# Altium PCB PCB1.PcbDoc
Units mm, origin at the board's own origin, x right, y up, seen from the top; angles counter-clockwise.
Board outline 250 x 94 mm, 2 copper layers (Top Layer, Bottom Layer); 174 components, 196 nets, 724 pads, 5 vias.
Unrouted connection lines stored in the file: 444.
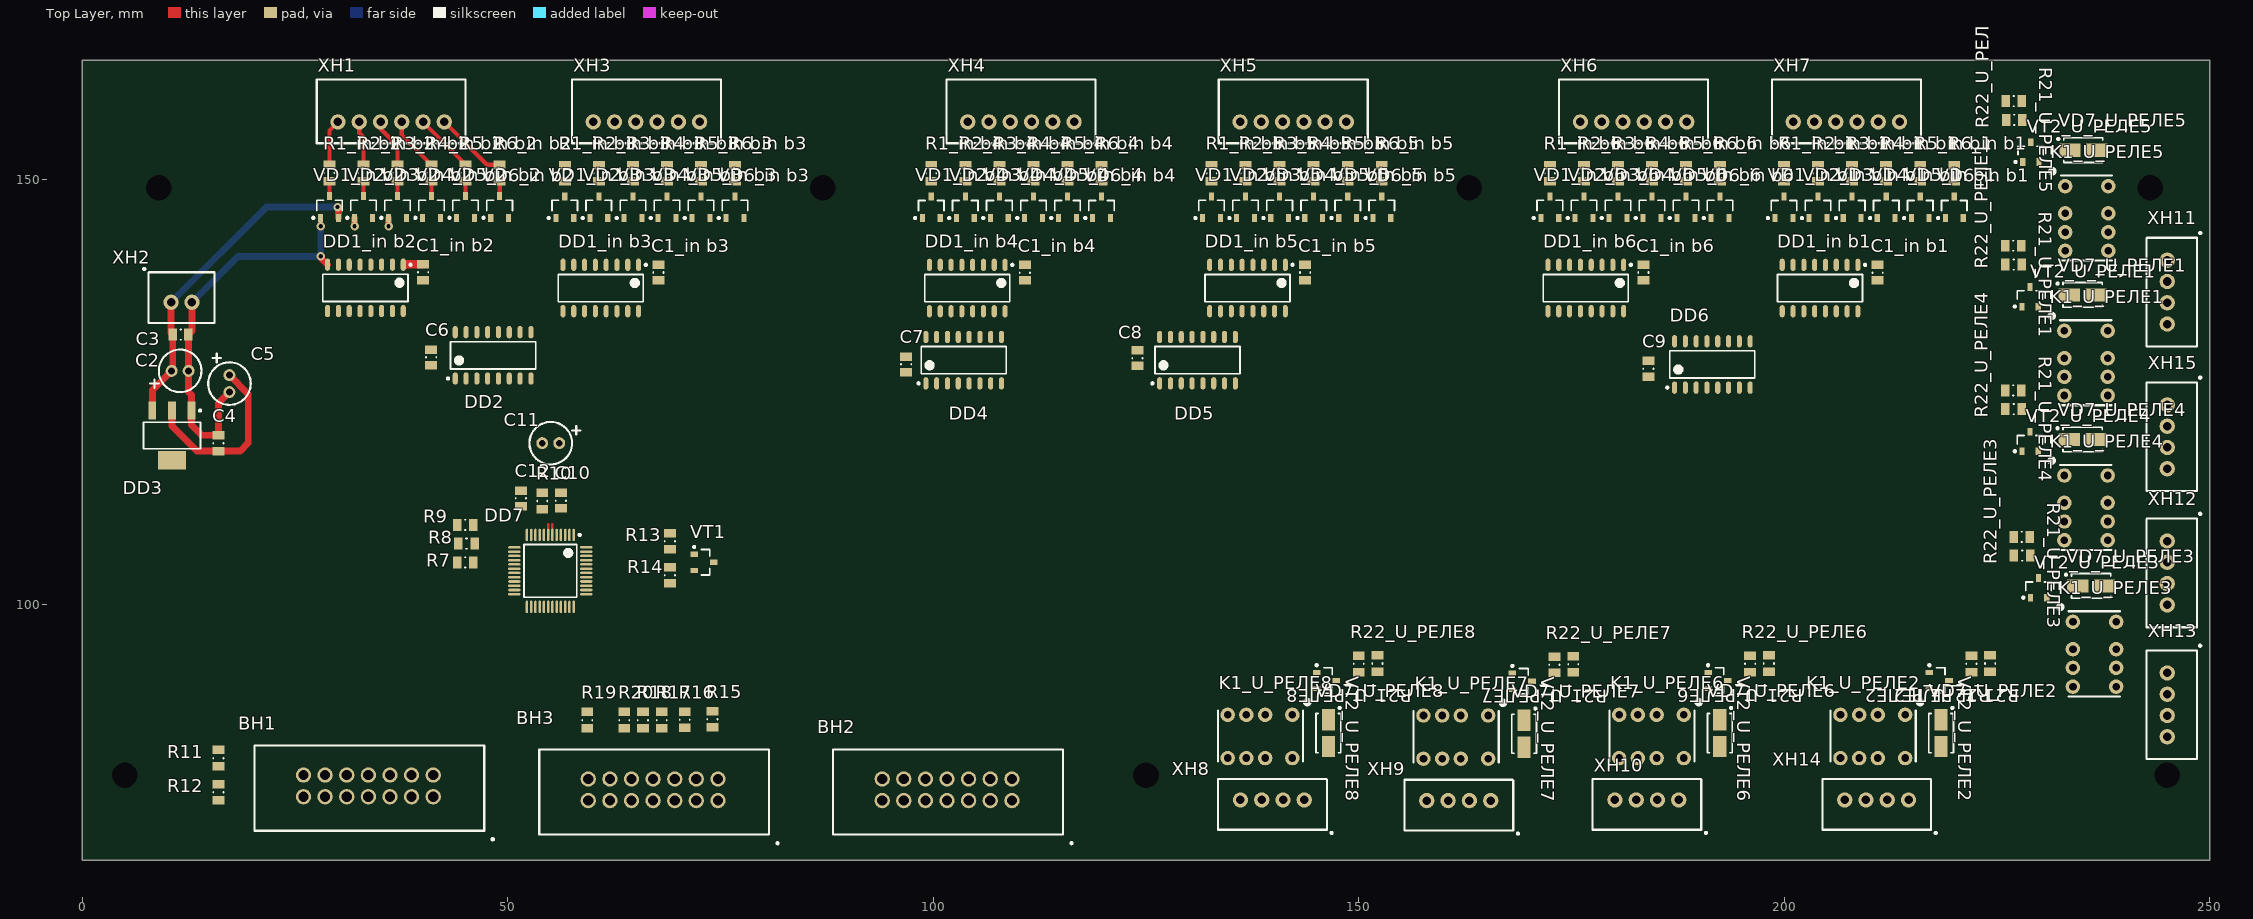
[diagram p0: Top Layer view]
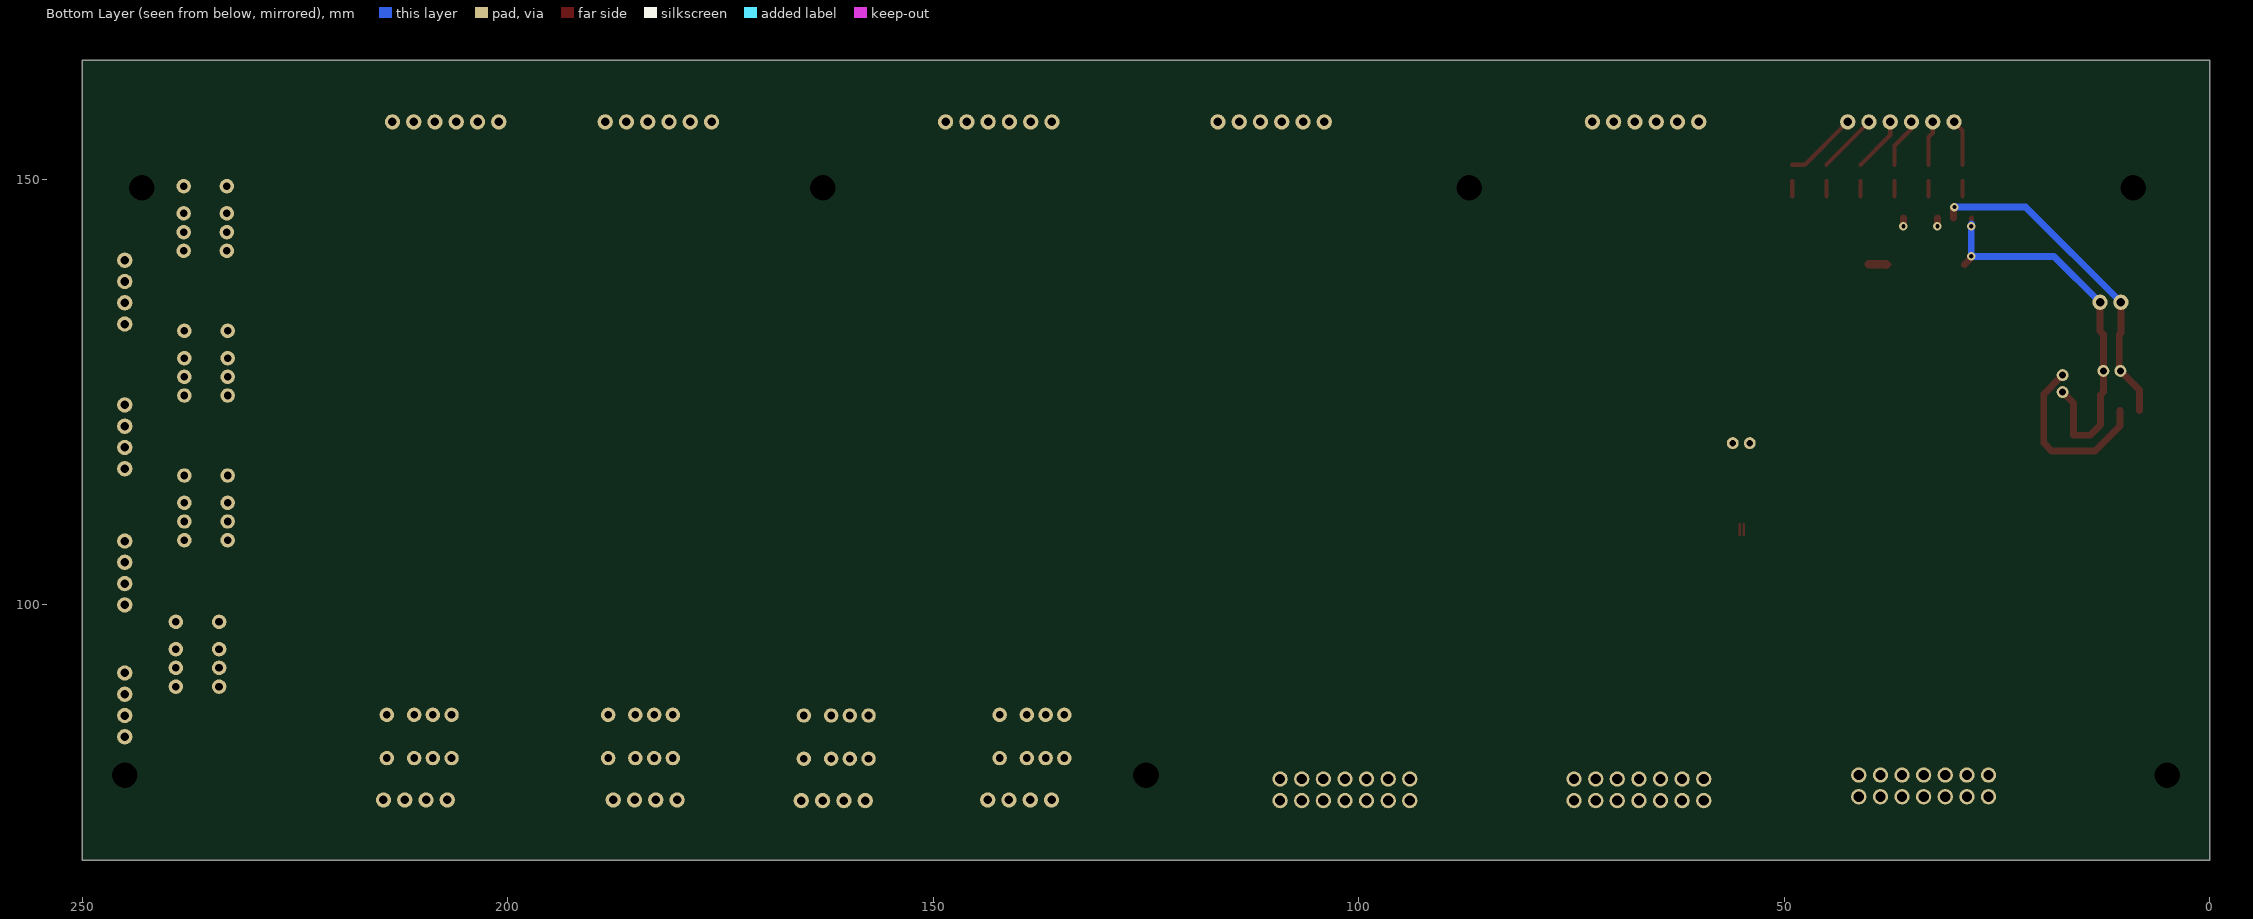
[diagram p1: Bottom Layer view, seen from below]

## Layer stack, top to bottom
Top Solder: solder mask 0.0102, Solder Resist, Dk 3.5
Top Layer: signal copper 0.0356
Dielectric 1: dielectric 0.32, FR-4, Dk 4.8
Bottom Layer: signal copper 0.0356
Bottom Solder: solder mask 0.0102, Solder Resist, Dk 3.5

## Board outline
0,70 0,164 250,164 250,70

## Design rules (kind name [scope] priority, off if disabled: settings)
Clearance [All] p1: gap=0.15 ignorepadtopadclearanceinfootprint=FALSE
PolygonConnect [All] p1: connectstyle=Relief reliefconductorwidth=0.254 reliefentries=4 polygonreliefangle="90 Angle" airgapwidth=0.254
RoomDefinition U_УПРАВЛ [InComponentClass('U_УПРАВЛ')] p1: confinementstyle=ConfineIn formatcopy=TRUE lockcomponents=FALSE outline 14.771,76.021 14.771,83.979 17.859,83.979 17.859,84.841 49.071,84.841 49.071,109.733 50.321,109.733 50.321,114.483 52.169,114.483 52.169,121.885 58.931,121.885 58.931,109.733 60.029,109.733 60.029,109.443 70.279,109.443 70.279,107.308 75.179,107.308 75.179,88.533 75.279,88.533 75.279,84.381 117.621,84.381 117.621,70.619 83.081,70.619 51.319,70.619 51.319,71.079 17.859,71.079 17.859,76.021
RoomDefinition СОЕД [InComponentClass('СОЕД')] p2: confinementstyle=ConfineIn formatcopy=TRUE lockcomponents=FALSE outline 133.094,72.701 133.094,79.911 242.169,79.911 242.169,144.204 249.379,144.204 249.379,95.704 249.379,81.494 249.379,72.701 218.304,72.701 169.204,72.701 169.204,72.621 154.994,72.621 154.994,72.701
RoomDefinition U_СОГЛАСОВАНИЕ [InComponentClass('U_СОГЛАСОВАНИЕ')] p3: confinementstyle=ConfineIn formatcopy=TRUE lockcomponents=FALSE outline 6.665,115.381 6.665,124.439 6.788,124.439 6.788,139.964 27.169,139.964 27.169,162.135 101.169,162.135 151.431,162.135 216.431,162.135 216.431,153.873 197.079,153.873 197.079,124.275 47.135,124.275 47.135,102.775 43.177,102.775 43.177,114.025 14.321,114.025 14.321,115.381
RoomDefinition U_РЕЛЕ8 [InComponentClass('U_РЕЛЕ8')] p4: confinementstyle=ConfineIn formatcopy=TRUE lockcomponents=FALSE outline 144.704,80.794 133.069,80.794 133.069,89.334 144.071,89.334 144.071,93.413 148.767,93.413 148.767,95.038 150.971,95.038 150.971,95.088 153.429,95.088 153.429,91.13 151.225,91.13 151.225,91.08 148.408,91.08 148.408,81.61 144.704,81.61
RoomDefinition U_РЕЛЕ7 [InComponentClass('U_РЕЛЕ7')] p5: confinementstyle=ConfineIn formatcopy=TRUE lockcomponents=FALSE outline 167.704,80.714 156.069,80.714 156.069,89.254 167.071,89.254 167.071,93.333 171.767,93.333 171.767,94.958 173.971,94.958 173.971,95.008 176.429,95.008 176.429,91.05 174.225,91.05 174.225,91 171.408,91 171.408,81.53 167.704,81.53
RoomDefinition U_РЕЛЕ5 [InComponentClass('U_РЕЛЕ5')] p6: confinementstyle=ConfineIn formatcopy=TRUE lockcomponents=FALSE outline 239.286,151.704 239.286,140.069 230.746,140.069 230.746,151.071 226.667,151.071 226.667,155.767 225.042,155.767 225.042,157.971 224.992,157.971 224.992,160.429 228.95,160.429 228.95,158.225 229,158.225 229,155.408 238.47,155.408 238.47,151.704
RoomDefinition U_РЕЛЕ4 [InComponentClass('U_РЕЛЕ4')] p7: confinementstyle=ConfineIn formatcopy=TRUE lockcomponents=FALSE outline 239.206,117.704 239.206,106.069 230.666,106.069 230.666,117.071 226.587,117.071 226.587,121.767 224.962,121.767 224.962,123.971 224.912,123.971 224.912,126.429 228.87,126.429 228.87,124.225 228.92,124.225 228.92,121.408 238.39,121.408 238.39,117.704
RoomDefinition U_РЕЛЕ3 [InComponentClass('U_РЕЛЕ3')] p8: confinementstyle=ConfineIn formatcopy=TRUE lockcomponents=FALSE outline 240.206,100.504 240.206,88.869 231.666,88.869 231.666,99.871 227.587,99.871 227.587,104.567 225.962,104.567 225.962,106.771 225.912,106.771 225.912,109.229 229.87,109.229 229.87,107.025 229.92,107.025 229.92,104.208 239.39,104.208 239.39,100.504
RoomDefinition U_РЕЛЕ2 [InComponentClass('U_РЕЛЕ2')] p9: confinementstyle=ConfineIn formatcopy=TRUE lockcomponents=FALSE outline 216.704,80.794 205.069,80.794 205.069,89.334 216.071,89.334 216.071,93.413 220.767,93.413 220.767,95.038 222.971,95.038 222.971,95.088 225.429,95.088 225.429,91.13 223.225,91.13 223.225,91.08 220.408,91.08 220.408,81.61 216.704,81.61
RoomDefinition U_РЕЛЕ1 [InComponentClass('U_РЕЛЕ1')] p10: confinementstyle=ConfineIn formatcopy=TRUE lockcomponents=FALSE outline 239.206,134.704 239.206,123.069 230.666,123.069 230.666,134.071 226.587,134.071 226.587,138.767 224.962,138.767 224.962,140.971 224.912,140.971 224.912,143.429 228.87,143.429 228.87,141.225 228.92,141.225 228.92,138.408 238.39,138.408 238.39,134.704
RoomDefinition U_РЕЛЕ6 [InComponentClass('U_РЕЛЕ6')] p11: confinementstyle=ConfineIn formatcopy=TRUE lockcomponents=FALSE outline 190.704,80.794 179.069,80.794 179.069,89.334 190.071,89.334 190.071,93.413 194.767,93.413 194.767,95.038 196.971,95.038 196.971,95.088 199.429,95.088 199.429,91.13 197.225,91.13 197.225,91.08 194.408,91.08 194.408,81.61 190.704,81.61
RoomDefinition "in b6" [InComponentClass('in b6')] p12: confinementstyle=ConfineIn formatcopy=TRUE lockcomponents=FALSE outline 170.05,144.454 170.05,149.012 171.225,149.012 171.225,152.712 179.225,152.712 181.683,152.712 193.683,152.712 193.683,149.012 194.483,149.012 194.483,144.454 184.683,144.454 184.683,137.079 182.479,137.079 182.479,133.254 171.151,133.254 171.151,144.454
RoomDefinition "in b5" [InComponentClass('in b5')] p13: confinementstyle=ConfineIn formatcopy=TRUE lockcomponents=FALSE outline 130.3,144.454 130.3,149.012 131.475,149.012 131.475,152.712 139.475,152.712 141.933,152.712 153.933,152.712 153.933,149.012 154.733,149.012 154.733,144.454 144.933,144.454 144.933,137.079 142.729,137.079 142.729,133.254 131.401,133.254 131.401,144.454
RoomDefinition "in b4" [InComponentClass('in b4')] p14: confinementstyle=ConfineIn formatcopy=TRUE lockcomponents=FALSE outline 97.365,144.45 97.365,149.008 98.54,149.008 98.54,152.708 106.54,152.708 108.998,152.708 120.998,152.708 120.998,149.008 121.798,149.008 121.798,144.45 111.998,144.45 111.998,137.075 109.794,137.075 109.794,133.25 98.466,133.25 98.466,144.45
RoomDefinition "in b3" [InComponentClass('in b3')] p15: confinementstyle=ConfineIn formatcopy=TRUE lockcomponents=FALSE outline 54.3,144.454 54.3,149.012 55.475,149.012 55.475,152.712 63.475,152.712 65.933,152.712 77.933,152.712 77.933,149.012 78.733,149.012 78.733,144.454 68.933,144.454 68.933,137.079 66.729,137.079 66.729,133.254 55.401,133.254 55.401,144.454
RoomDefinition "in b2" [InComponentClass('in b2')] p16: confinementstyle=ConfineIn formatcopy=TRUE lockcomponents=FALSE outline 26.646,144.475 26.646,149.033 27.821,149.033 27.821,152.733 35.821,152.733 38.279,152.733 50.279,152.733 50.279,149.033 51.079,149.033 51.079,144.475 41.279,144.475 41.279,137.1 39.075,137.1 39.075,133.275 27.747,133.275 27.747,144.475
RoomDefinition "in b1" [InComponentClass('in b1')] p17: confinementstyle=ConfineIn formatcopy=TRUE lockcomponents=FALSE outline 197.575,144.45 197.575,149.008 198.75,149.008 198.75,152.708 206.75,152.708 209.208,152.708 221.208,152.708 221.208,149.008 222.008,149.008 222.008,144.45 212.208,144.45 212.208,137.075 210.004,137.075 210.004,133.25 198.676,133.25 198.676,144.45
RoutingVias [All] p1: holewidth=0.5 width=1 viastyle="Through Hole" minholewidth=0.5 minwidth=1 maxholewidth=0.5 maxwidth=1
SolderMaskExpansion [All] p1: expansion=0.102
Width Width_3 [InNet('+12')] p1: maxlimit=1 minlimit=0.3 preferedwidth=1
Width Width_2 [InNet('+3.3')] p2: maxlimit=1 minlimit=0.3 preferedwidth=1
Width Width_1 [InNet('GND')] p3: maxlimit=1 minlimit=0.3 preferedwidth=1
Width [All] p4: maxlimit=1 minlimit=0.25 preferedwidth=0.5
30 further rules are at their usual default settings.

## Classes and differential pairs
channel class РЕЛЕ: U_РЕЛЕ1 U_РЕЛЕ2 U_РЕЛЕ3 U_РЕЛЕ4 U_РЕЛЕ5 U_РЕЛЕ6 U_РЕЛЕ7 U_РЕЛЕ8
component class СОЕД: XH8 XH9 XH10 XH11 XH12 XH13 XH14 XH15
component class U_РЕЛЕ8: K1_U_РЕЛЕ8 R21_U_РЕЛЕ8 R22_U_РЕЛЕ8 VD7_U_РЕЛЕ8 VT2_U_РЕЛЕ8
component class U_РЕЛЕ7: K1_U_РЕЛЕ7 R21_U_РЕЛЕ7 R22_U_РЕЛЕ7 VD7_U_РЕЛЕ7 VT2_U_РЕЛЕ7
component class U_РЕЛЕ6: K1_U_РЕЛЕ6 R21_U_РЕЛЕ6 R22_U_РЕЛЕ6 VD7_U_РЕЛЕ6 VT2_U_РЕЛЕ6
component class U_РЕЛЕ5: K1_U_РЕЛЕ5 R21_U_РЕЛЕ5 R22_U_РЕЛЕ5 VD7_U_РЕЛЕ5 VT2_U_РЕЛЕ5
component class U_РЕЛЕ4: K1_U_РЕЛЕ4 R21_U_РЕЛЕ4 R22_U_РЕЛЕ4 VD7_U_РЕЛЕ4 VT2_U_РЕЛЕ4
component class U_РЕЛЕ3: K1_U_РЕЛЕ3 R21_U_РЕЛЕ3 R22_U_РЕЛЕ3 VD7_U_РЕЛЕ3 VT2_U_РЕЛЕ3
component class U_РЕЛЕ2: K1_U_РЕЛЕ2 R21_U_РЕЛЕ2 R22_U_РЕЛЕ2 VD7_U_РЕЛЕ2 VT2_U_РЕЛЕ2
component class U_РЕЛЕ1: K1_U_РЕЛЕ1 R21_U_РЕЛЕ1 R22_U_РЕЛЕ1 VD7_U_РЕЛЕ1 VT2_U_РЕЛЕ1
channel class "ВХ Б (1-6)": "in b1" "in b2" "in b3" "in b4" "in b5" "in b6"
component class U_УПРАВЛ: BH1 BH2 BH3 C10 C11 C12 DD7 R10 R11 R12 R13 R14 R15 R16 R17 R18 R19 R20 VT1
component class U_СОГЛАСОВАНИЕ: C2 C3 C4 C5 C6 C7 C8 C9 DD2 DD3 DD4 DD5 DD6 R7 R8 R9 XH1 XH2 XH3 XH4 XH5 XH6 XH7
component class "in b6": "C1_in b6" "DD1_in b6" "R1_in b6" "R2_in b6" "R3_in b6" "R4_in b6" "R5_in b6" "R6_in b6" "VD1_in b6" "VD2_in b6" "VD3_in b6" "VD4_in b6" "VD5_in b6" "VD6_in b6"
component class "in b5": "C1_in b5" "DD1_in b5" "R1_in b5" "R2_in b5" "R3_in b5" "R4_in b5" "R5_in b5" "R6_in b5" "VD1_in b5" "VD2_in b5" "VD3_in b5" "VD4_in b5" "VD5_in b5" "VD6_in b5"
component class "in b4": "C1_in b4" "DD1_in b4" "R1_in b4" "R2_in b4" "R3_in b4" "R4_in b4" "R5_in b4" "R6_in b4" "VD1_in b4" "VD2_in b4" "VD3_in b4" "VD4_in b4" "VD5_in b4" "VD6_in b4"
component class "in b3": "C1_in b3" "DD1_in b3" "R1_in b3" "R2_in b3" "R3_in b3" "R4_in b3" "R5_in b3" "R6_in b3" "VD1_in b3" "VD2_in b3" "VD3_in b3" "VD4_in b3" "VD5_in b3" "VD6_in b3"
component class "in b2": "C1_in b2" "DD1_in b2" "R1_in b2" "R2_in b2" "R3_in b2" "R4_in b2" "R5_in b2" "R6_in b2" "VD1_in b2" "VD2_in b2" "VD3_in b2" "VD4_in b2" "VD5_in b2" "VD6_in b2"
component class "in b1": "C1_in b1" "DD1_in b1" "R1_in b1" "R2_in b1" "R3_in b1" "R4_in b1" "R5_in b1" "R6_in b1" "VD1_in b1" "VD2_in b1" "VD3_in b1" "VD4_in b1" "VD5_in b1" "VD6_in b1"

## Components (designator, comment, footprint, x,y, rotation, side; value= is the part's Value field where it differs from the comment)
BH1 "BH14(1)" "BH-14 (DS1013-14S) (IDC-14MS)" 41.24,77.46 r180 top
BH2 "BH14(2)" "BH-14 (DS1013-14S) (IDC-14MS)" 109.24,77 r180 top
BH3 "BH14(3)" "BH-14 (DS1013-14S) (IDC-14MS)" 74.7,77 r180 top
"C1_in b1" "C(ceramic)" C(ceramic) 210.979,139.054 r270 top (schematic designator C1)
"C1_in b2" "C(ceramic)" C(ceramic) 40.05,139.079 r270 top (schematic designator C1)
"C1_in b3" "C(ceramic)" C(ceramic) 67.704,139.058 r270 top (schematic designator C1)
"C1_in b4" "C(ceramic)" C(ceramic) 110.769,139.054 r270 top (schematic designator C1)
"C1_in b5" "C(ceramic)" C(ceramic) 143.704,139.058 r270 top (schematic designator C1)
"C1_in b6" "C(ceramic)" C(ceramic) 183.454,139.058 r270 top (schematic designator C1)
C2 "C(AlEL)" C(AlEL) 12.5,127.5 r180 top
C3 "C(ceramic)" C(ceramic) 11.55,131.754 r180 top
C4 "C(ceramic)" C(ceramic) 16,119 r270 top
C5 "C(AlEL)" C(AlEL) 17.3,125.004 r90 top
C6 "C(ceramic)" C(ceramic) 41,129.075 r90 top
C7 "C(ceramic)" C(ceramic) 96.8,128.254 r90 top
C8 "C(ceramic)" C(ceramic) 124,129 r90 top
C9 "C(ceramic)" C(ceramic) 184.026,127.754 r90 top
C10 "C(ceramic)" C(ceramic) 56.254,112.254 r270 top
C11 "C(AlEL)" C(AlEL) 54.05,119.004 r0 top
C12 "C(ceramic)" C(ceramic) 51.55,112.504 r90 top
"DD1_in b1" "74HC4050" 74HC4050(51) 204.205,137.229 r270 top (schematic designator DD1)
"DD1_in b2" "74HC4050" 74HC4050(51) 33.276,137.254 r270 top (schematic designator DD1)
"DD1_in b3" "74HC4050" 74HC4050(51) 60.93,137.233 r270 top (schematic designator DD1)
"DD1_in b4" "74HC4050" 74HC4050(51) 103.995,137.229 r270 top (schematic designator DD1)
"DD1_in b5" "74HC4050" 74HC4050(51) 136.93,137.233 r270 top (schematic designator DD1)
"DD1_in b6" "74HC4050" 74HC4050(51) 176.68,137.233 r270 top (schematic designator DD1)
DD2 "74HC4051" 74HC4050(51) 48.274,129.325 r90 top
DD3 "L1117" LDL1117 10.544,119.91 r270 top
DD4 "74HC4051" 74HC4050(51) 103.574,128.754 r90 top
DD5 "74HC4051" 74HC4050(51) 131.05,128.754 r90 top
DD6 "74HC4051" 74HC4050(51) 191.55,128.254 r90 top
DD7 "MSP430FR2355TPT" MSP430FR2355TPT 55,104 r270 top
K1_U_РЕЛЕ1 "IM06TS" IM06TS 232.92,132.2 r270 top (schematic designator K1)
K1_U_РЕЛЕ2 "IM06TS" IM06TS 214.2,87.08 r180 top (schematic designator K1)
K1_U_РЕЛЕ3 "IM06TS" IM06TS 233.92,98 r270 top (schematic designator K1)
K1_U_РЕЛЕ4 "IM06TS" IM06TS 232.92,115.2 r270 top (schematic designator K1)
K1_U_РЕЛЕ5 "IM06TS" IM06TS 233,149.2 r270 top (schematic designator K1)
K1_U_РЕЛЕ6 "IM06TS" IM06TS 188.2,87.08 r180 top (schematic designator K1)
K1_U_РЕЛЕ7 "IM06TS" IM06TS 165.2,87 r180 top (schematic designator K1)
K1_U_РЕЛЕ8 "IM06TS" IM06TS 142.2,87.08 r180 top (schematic designator K1)
"R1_in b1" "R" R 199.979,150.729 r270 top (schematic designator R1)
"R1_in b2" "R" R 29.05,150.754 r270 top (schematic designator R1)
"R1_in b3" "R" R 56.704,150.733 r270 top (schematic designator R1)
"R1_in b4" "R" R 99.769,150.729 r270 top (schematic designator R1)
"R1_in b5" "R" R 132.704,150.733 r270 top (schematic designator R1)
"R1_in b6" "R" R 172.454,150.733 r270 top (schematic designator R1)
"R2_in b1" "R" R 203.979,150.729 r270 top (schematic designator R2)
"R2_in b2" "R" R 33.05,150.754 r270 top (schematic designator R2)
"R2_in b3" "R" R 60.704,150.733 r270 top (schematic designator R2)
"R2_in b4" "R" R 103.769,150.729 r270 top (schematic designator R2)
"R2_in b5" "R" R 136.704,150.733 r270 top (schematic designator R2)
"R2_in b6" "R" R 176.454,150.733 r270 top (schematic designator R2)
"R3_in b1" "R" R 207.979,150.729 r270 top (schematic designator R3)
"R3_in b2" "R" R 37.05,150.754 r270 top (schematic designator R3)
"R3_in b3" "R" R 64.704,150.733 r270 top (schematic designator R3)
"R3_in b4" "R" R 107.769,150.729 r270 top (schematic designator R3)
"R3_in b5" "R" R 140.704,150.733 r270 top (schematic designator R3)
"R3_in b6" "R" R 180.454,150.733 r270 top (schematic designator R3)
"R4_in b1" "R" R 211.979,150.729 r270 top (schematic designator R4)
"R4_in b2" "R" R 41.05,150.754 r270 top (schematic designator R4)
"R4_in b3" "R" R 68.704,150.733 r270 top (schematic designator R4)
"R4_in b4" "R" R 111.769,150.729 r270 top (schematic designator R4)
"R4_in b5" "R" R 144.704,150.733 r270 top (schematic designator R4)
"R4_in b6" "R" R 184.454,150.733 r270 top (schematic designator R4)
"R5_in b1" "R" R 215.979,150.729 r270 top (schematic designator R5)
"R5_in b2" "R" R 45.05,150.754 r270 top (schematic designator R5)
"R5_in b3" "R" R 72.704,150.733 r270 top (schematic designator R5)
"R5_in b4" "R" R 115.769,150.729 r270 top (schematic designator R5)
"R5_in b5" "R" R 148.704,150.733 r270 top (schematic designator R5)
"R5_in b6" "R" R 188.454,150.733 r270 top (schematic designator R5)
"R6_in b1" "R" R 219.979,150.729 r270 top (schematic designator R6)
"R6_in b2" "R" R 49.05,150.754 r270 top (schematic designator R6)
"R6_in b3" "R" R 76.704,150.733 r270 top (schematic designator R6)
"R6_in b4" "R" R 119.769,150.729 r270 top (schematic designator R6)
"R6_in b5" "R" R 152.704,150.733 r270 top (schematic designator R6)
"R6_in b6" "R" R 192.454,150.733 r270 top (schematic designator R6)
R7 "R" R 45,105 r0 top
R8 "R" R 45.156,107.204 r0 top
R9 "R" R 45,109.409 r0 top
R10 "R" R 54.05,112.204 r270 top
R11 "R" R 16,82 r90 top
R12 "R" R 16,78 r90 top
R13 "R" R 69.05,107.464 r90 top
R14 "R" R 69.05,103.464 r90 top
R15 "R" R 74.05,86.554 r270 top
R16 "R" R 70.8,86.504 r270 top
R17 "R" R 68.096,86.464 r270 top
R18 "R" R 65.892,86.464 r270 top
R19 "R" R 59.346,86.464 r270 top
R20 "R" R 63.687,86.464 r270 top
R21_U_РЕЛЕ1 "R" R 226.891,142.2 r180 top (schematic designator R21)
R21_U_РЕЛЕ2 "R" R 224.2,93.109 r90 top (schematic designator R21)
R21_U_РЕЛЕ3 "R" R 227.891,108 r180 top (schematic designator R21)
R21_U_РЕЛЕ4 "R" R 226.891,125.2 r180 top (schematic designator R21)
R21_U_РЕЛЕ5 "R" R 226.971,159.2 r180 top (schematic designator R21)
R21_U_РЕЛЕ6 "R" R 198.2,93.109 r90 top (schematic designator R21)
R21_U_РЕЛЕ7 "R" R 175.2,93.029 r90 top (schematic designator R21)
R21_U_РЕЛЕ8 "R" R 152.2,93.109 r90 top (schematic designator R21)
R22_U_РЕЛЕ1 "R" R 226.941,139.996 r180 top (schematic designator R22)
R22_U_РЕЛЕ2 "R" R 221.996,93.059 r90 top (schematic designator R22)
R22_U_РЕЛЕ3 "R" R 227.941,105.796 r180 top (schematic designator R22)
R22_U_РЕЛЕ4 "R" R 226.941,122.996 r180 top (schematic designator R22)
R22_U_РЕЛЕ5 "R" R 227.021,156.996 r180 top (schematic designator R22)
R22_U_РЕЛЕ6 "R" R 195.996,93.059 r90 top (schematic designator R22)
R22_U_РЕЛЕ7 "R" R 172.996,92.979 r90 top (schematic designator R22)
R22_U_РЕЛЕ8 "R" R 149.996,93.059 r90 top (schematic designator R22)
"VD1_in b1" "BAV99" BAV99 199.979,146.729 r90 top (schematic designator VD1)
"VD1_in b2" "BAV99" BAV99 29.05,146.754 r90 top (schematic designator VD1)
"VD1_in b3" "BAV99" BAV99 56.704,146.733 r90 top (schematic designator VD1)
"VD1_in b4" "BAV99" BAV99 99.769,146.729 r90 top (schematic designator VD1)
"VD1_in b5" "BAV99" BAV99 132.704,146.733 r90 top (schematic designator VD1)
"VD1_in b6" "BAV99" BAV99 172.454,146.733 r90 top (schematic designator VD1)
"VD2_in b1" "BAV99" BAV99 203.979,146.729 r90 top (schematic designator VD2)
"VD2_in b2" "BAV99" BAV99 33.05,146.754 r90 top (schematic designator VD2)
"VD2_in b3" "BAV99" BAV99 60.704,146.733 r90 top (schematic designator VD2)
"VD2_in b4" "BAV99" BAV99 103.769,146.729 r90 top (schematic designator VD2)
"VD2_in b5" "BAV99" BAV99 136.704,146.733 r90 top (schematic designator VD2)
"VD2_in b6" "BAV99" BAV99 176.454,146.733 r90 top (schematic designator VD2)
"VD3_in b1" "BAV99" BAV99 207.979,146.729 r90 top (schematic designator VD3)
"VD3_in b2" "BAV99" BAV99 37.05,146.754 r90 top (schematic designator VD3)
"VD3_in b3" "BAV99" BAV99 64.704,146.733 r90 top (schematic designator VD3)
"VD3_in b4" "BAV99" BAV99 107.769,146.729 r90 top (schematic designator VD3)
"VD3_in b5" "BAV99" BAV99 140.704,146.733 r90 top (schematic designator VD3)
"VD3_in b6" "BAV99" BAV99 180.454,146.733 r90 top (schematic designator VD3)
"VD4_in b1" "BAV99" BAV99 211.979,146.729 r90 top (schematic designator VD4)
"VD4_in b2" "BAV99" BAV99 41.05,146.754 r90 top (schematic designator VD4)
"VD4_in b3" "BAV99" BAV99 68.704,146.733 r90 top (schematic designator VD4)
"VD4_in b4" "BAV99" BAV99 111.769,146.729 r90 top (schematic designator VD4)
"VD4_in b5" "BAV99" BAV99 144.704,146.733 r90 top (schematic designator VD4)
"VD4_in b6" "BAV99" BAV99 184.454,146.733 r90 top (schematic designator VD4)
"VD5_in b1" "BAV99" BAV99 215.979,146.729 r90 top (schematic designator VD5)
"VD5_in b2" "BAV99" BAV99 45.05,146.754 r90 top (schematic designator VD5)
"VD5_in b3" "BAV99" BAV99 72.704,146.733 r90 top (schematic designator VD5)
"VD5_in b4" "BAV99" BAV99 115.769,146.729 r90 top (schematic designator VD5)
"VD5_in b5" "BAV99" BAV99 148.704,146.733 r90 top (schematic designator VD5)
"VD5_in b6" "BAV99" BAV99 188.454,146.733 r90 top (schematic designator VD5)
"VD6_in b1" "BAV99" BAV99 219.979,146.729 r90 top (schematic designator VD6)
"VD6_in b2" "BAV99" BAV99 49.05,146.754 r90 top (schematic designator VD6)
"VD6_in b3" "BAV99" BAV99 76.704,146.733 r90 top (schematic designator VD6)
"VD6_in b4" "BAV99" BAV99 119.769,146.729 r90 top (schematic designator VD6)
"VD6_in b5" "BAV99" BAV99 152.704,146.733 r90 top (schematic designator VD6)
"VD6_in b6" "BAV99" BAV99 192.454,146.733 r90 top (schematic designator VD6)
VD7_U_РЕЛЕ1 "SS14" SS14 235.061,136.429 r0 top (schematic designator VD7)
VD7_U_РЕЛЕ2 "SS14" SS14 218.429,84.939 r270 top (schematic designator VD7)
VD7_U_РЕЛЕ3 "SS14" SS14 236.061,102.229 r0 top (schematic designator VD7)
VD7_U_РЕЛЕ4 "SS14" SS14 235.061,119.429 r0 top (schematic designator VD7)
VD7_U_РЕЛЕ5 "SS14" SS14 235.141,153.429 r0 top (schematic designator VD7)
VD7_U_РЕЛЕ6 "SS14" SS14 192.429,84.939 r270 top (schematic designator VD7)
VD7_U_РЕЛЕ7 "SS14" SS14 169.429,84.859 r270 top (schematic designator VD7)
VD7_U_РЕЛЕ8 "SS14" SS14 146.429,84.939 r270 top (schematic designator VD7)
VT1 "IRLML6402" BC847(IRLML6402) 73.05,105.004 r0 top
VT2_U_РЕЛЕ1 "BC837(КТ3130)" BC847(IRLML6402) 228.891,136.2 r90 top (schematic designator VT2)
VT2_U_РЕЛЕ2 "BC837(КТ3130)" BC847(IRLML6402) 218.2,91.109 r0 top (schematic designator VT2)
VT2_U_РЕЛЕ3 "BC837(КТ3130)" BC847(IRLML6402) 229.891,102 r90 top (schematic designator VT2)
VT2_U_РЕЛЕ4 "BC837(КТ3130)" BC847(IRLML6402) 228.891,119.2 r90 top (schematic designator VT2)
VT2_U_РЕЛЕ5 "BC837(КТ3130)" BC847(IRLML6402) 228.971,153.2 r90 top (schematic designator VT2)
VT2_U_РЕЛЕ6 "BC837(КТ3130)" BC847(IRLML6402) 192.2,91.109 r0 top (schematic designator VT2)
VT2_U_РЕЛЕ7 "BC837(КТ3130)" BC847(IRLML6402) 169.2,91.029 r0 top (schematic designator VT2)
VT2_U_РЕЛЕ8 "BC837(КТ3130)" BC847(IRLML6402) 146.2,91.109 r0 top (schematic designator VT2)
XH1 "ХH(6)" XH(6) 30.05,156.754 r0 top
XH2 "ХН(2)" ХН(2) 10.442,135.56 r0 top
XH3 "ХH(6)" XH(6) 60.05,156.754 r0 top
XH4 "ХH(6)" XH(6) 104.05,156.754 r0 top
XH5 "ХH(6)" XH(6) 136.05,156.754 r0 top
XH6 "ХH(6)" XH(6) 176.05,156.754 r0 top
XH7 "ХH(6)" XH(6) 201.05,156.754 r0 top
XH8 "ХН(4)" ХН(4) 143.6,77.08 r180 top
XH9 "ХН(4)" ХН(4) 165.5,77 r180 top
XH10 "ХН(4)" ХН(4) 187.6,77.08 r180 top
XH11 "ХН(4)" ХН(4) 245,140.5 r270 top
XH12 "ХН(4)" ХН(4) 245,107.5 r270 top
XH13 "ХН(4)" ХН(4) 245,92 r270 top
XH14 "ХН(4)" ХН(4) 214.6,77.08 r180 top
XH15 "ХН(4)" ХН(4) 245,123.5 r270 top

## Footprints (in the part's own frame and the unit in brackets; to place one, negate y for a bottom-side part, rotate by r counter-clockwise, add the part's x,y. Pads: shape width x height; smd on the part's side, far side on the other; paste and mask are expansions set on the pad)
74HC4050(51) [mm]
  oval 1.45x0.6 smd: 1(-2.725,4.445) 2(-2.725,3.175) 3(-2.725,1.905) 4(-2.725,0.635) 5(-2.725,-0.635) 6(-2.725,-1.905) 7(-2.725,-3.175) 8(-2.725,-4.445) 9(2.725,-4.445) 10(2.725,-3.175) 11(2.725,-1.905) 12(2.725,-0.635) 13(2.725,0.635) 14(2.725,1.905) 15(2.725,3.175) 16(2.725,4.445)
  silkscreen extent -2.85,-5 1.6,5.42, body extent -3,-5 3,5, height 1.75
BAV99 [mm] "SOT23, 3-Leads, Body 2,90x2,45mm, Pitch 1,05mm, IPC Medium Density"
  rect 0.95x0.6 smd: 1(-1.275,1.05) 2(-1.275,-1.05) 3(1.275,0)
  silkscreen extent -1.4,-1.5 0.8,2.02, body extent -1.4,-1.5 1.4,1.5, height 1.3
BC847(IRLML6402) [mm] "SOT23, 3-Leads, Body 2,80x2,30mm, Pitch 0,95mm, IPC Medium Density"
  rect 0.9x0.6 smd: 1(-1.15,0.95) 2(-1.15,-0.95) 3(1.15,0)
  silkscreen extent -1.27,-1.5 0.7,1.92, body extent -1.3,-1.5 1.3,1.5, height 1.1
"BH-14 (DS1013-14S) (IDC-14MS)" [mm]
  round 1.8 hole 1.2: 1(0,0) 2(2.54,0) 3(5.08,0) 4(7.62,0) 5(10.16,0) 6(12.7,0) 7(15.24,0) 8(0,-2.54) 9(2.54,-2.54) 10(5.08,-2.54) 11(7.62,-2.54) 12(10.16,-2.54) 13(12.7,-2.54) 14(15.24,-2.54)
  silkscreen extent -7.13,-6 21,5.12, body extent -5.1,-5.7 20.3,3.65, height 10.25
C(AlEL) [mm]
  round 1.4 hole 0.8: 1(2,0) 2(0,0)
  silkscreen extent -1.5,-2.5 4.5,2.5, body extent -1.5,-2.5 3.5,2.5, height 12
C(ceramic) [mm] "Chip Capacitor, 2-Leads, Body 2,00x1,25mm, IPC Medium Density"
  rect 1x1.4 smd: 1(-0.925,0) 2(0.925,0)
  silkscreen extent -0.05,-0.6 0.05,0.6, body extent -1,-0.63 1,0.63, height 1.3
IM06TS [mm]
  round 1.7 hole 0.9: 1(0,0) 2(3.2,0) 3(5.4,0) 4(7.6,0) 5(7.6,5.08) 6(5.4,5.08) 7(3.2,5.08) 8(0,5.08)
  silkscreen extent -2,-1.75 8.75,5.5, body extent -1.25,-0.5 8.75,5.5, height 5.4
LDL1117 [mm]
  rect 2.15x0.9 smd: 1(-2.925,2.3) 2(-2.925,0) 3(-2.925,-2.3)
  rect 2.15x3.25 smd: 2(2.925,0)
  silkscreen extent -3.05,-3.35 1.55,3.43, body extent -3.5,-3.35 3.5,3.35, height 1.8
MSP430FR2355TPT [mm] "TSQFP, 48-Leads, Body 7,00x7,00mm, Pitch 0,50mm, IPC Medium Density"
  oval 1.45x0.3 smd: 1(-4.225,2.75) 2(-4.225,2.25) 3(-4.225,1.75) 4(-4.225,1.25) 5(-4.225,0.75) 6(-4.225,0.25) 7(-4.225,-0.25) 8(-4.225,-0.75) 9(-4.225,-1.25) 10(-4.225,-1.75) 11(-4.225,-2.25) 12(-4.225,-2.75) 25(4.225,-2.75) 26(4.225,-2.25) 27(4.225,-1.75) 28(4.225,-1.25) 29(4.225,-0.75) 30(4.225,-0.25) 31(4.225,0.25) 32(4.225,0.75) 33(4.225,1.25) 34(4.225,1.75) 35(4.225,2.25) 36(4.225,2.75)
  oval 0.3x1.45 smd: 13(-2.75,-4.225) 14(-2.25,-4.225) 15(-1.75,-4.225) 16(-1.25,-4.225) 17(-0.75,-4.225) 18(-0.25,-4.225) 19(0.25,-4.225) 20(0.75,-4.225) 21(1.25,-4.225) 22(1.75,-4.225) 23(2.25,-4.225) 24(2.75,-4.225) 37(2.75,4.225) 38(2.25,4.225) 39(1.75,4.225) 40(1.25,4.225) 41(0.75,4.225) 42(0.25,4.225) 43(-0.25,4.225) 44(-0.75,4.225) 45(-1.25,4.225) 46(-1.75,4.225) 47(-2.25,4.225) 48(-2.75,4.225)
  silkscreen extent -4.35,-3.1 3.1,3.58, body extent -4.5,-4.5 4.5,4.5, height 1.6
R [mm] "Chip Resistor, 2-Leads, Body 2,10x1,30mm, IPC Medium Density"
  rect 1x1.4 smd: 1(-0.95,0) 2(0.95,0)
  silkscreen extent -0.05,-0.6 0.05,0.6, body extent -1.1,-0.7 1.1,0.7, height 0.6
SS14 [mm] "Molded Diode, 2-Leads, Body 4,30x2,70mm, IPC Medium Density"
  rect 2.5x1.55 smd: 1(-1.575,0) 2(1.575,0)
  silkscreen extent -3.07,-1.45 2.3,1.45, body extent -2.52,-1.45 2.52,1.45, height 2.44
XH(6) [mm]
  round 1.8 hole 1: 1(0,0) 2(2.5,0) 3(5,0) 4(7.5,0) 5(10,0) 6(12.5,0)
  silkscreen extent -2.5,-2.5 15,5, body extent -2.45,-2.35 14.95,3.4, height 7
ХН(2) [mm]
  round 1.8 hole 1: 1(0,0) 2(2.45,0)
  silkscreen extent -3.27,-2.45 5.1,4.02, body extent -2.55,-2.32 4.95,3.38, height 7
ХН(4) [mm]
  round 1.8 hole 1: 1(0,0) 2(2.5,0) 3(5,0) 4(7.5,0)
  silkscreen extent -3.32,-2.45 10.12,4, body extent -2.53,-2.3 9.98,3.4, height 7

## Part data
DD3: library part LDL1117

## Free pads (board coordinates)
  round 1.6 hole 3 unplated: *(5,80) *(9,149) *(87,149) *(125,80) *(163,149) *(243,149) *(245,80) *(319,11) *(319,80) *(319,149) *(397,11) *(397,149) *(439,80) *(473,11) *(473,149) *(553,11) *(553,149) *(559,80) *(633,80)

## Via types
v1: diameter 1, hole 0.5, Top Layer to Bottom Layer, tented both sides, 5 vias

## Nets (pads, with @x,y where several pads share a name; then routed paths per layer and width w, separated by ;. In a path a pad name is that pad's centre, name@x,y a point inside that pad or via, vN(x,y) a via of type N, cw(c..) or ccw(c..) an arc to the next point about the centre after c; other vN are vias at no path point)
+3.3: "C1_in b1.1" "C1_in b2.1" "C1_in b3.1" "C1_in b4.1" "C1_in b5.1" "C1_in b6.1" "DD1_in b1.1" "DD1_in b2.1" "DD1_in b3.1" "DD1_in b4.1" "DD1_in b5.1" "DD1_in b6.1" BH1.9 C4.2 C5.1 C6.2 C7.2 C8.2 C9.2 C11.1 C12.2 DD2.16 DD3.2 DD5.16 DD6.16 DD7.6 R10.2 R11.2 R12.2 R13.2 VT1.3 | length 24.9
  Top Layer w0.3: DD7.6 55.25,109.5
  Top Layer w0.6: 37.721,139.979 38,139.979
  Top Layer w0.8: DD3.2@10.544,122.835 10.544,121.017 13.5,118.06 13.515,118.075 C4.2 18.575,118.075 19.5,119 19.5,124.804 C5.1
  Top Layer w1: 38,139.979 38.025,140.004 40.05,140.004
+12: "VD1_in b1.2" "VD1_in b2.2" "VD1_in b3.2" "VD1_in b4.2" "VD1_in b5.2" "VD1_in b6.2" "VD2_in b1.2" "VD2_in b2.2" "VD2_in b3.2" "VD2_in b4.2" "VD2_in b5.2" "VD2_in b6.2" "VD3_in b1.2" "VD3_in b2.2" "VD3_in b3.2" "VD3_in b4.2" "VD3_in b5.2" "VD3_in b6.2" "VD4_in b1.2" "VD4_in b2.2" "VD4_in b3.2" "VD4_in b4.2" "VD4_in b5.2" "VD4_in b6.2" "VD5_in b1.2" "VD5_in b2.2" "VD5_in b3.2" "VD5_in b4.2" "VD5_in b5.2" "VD5_in b6.2" "VD6_in b1.2" "VD6_in b2.2" "VD6_in b3.2" "VD6_in b4.2" "VD6_in b5.2" "VD6_in b6.2" C2.1 C3.2 DD3.3 K1_U_РЕЛЕ1.1 K1_U_РЕЛЕ2.1 K1_U_РЕЛЕ3.1 K1_U_РЕЛЕ4.1 K1_U_РЕЛЕ5.1 K1_U_РЕЛЕ6.1 K1_U_РЕЛЕ7.1 K1_U_РЕЛЕ8.1 VD7_U_РЕЛЕ1.1 VD7_U_РЕЛЕ2.1 VD7_U_РЕЛЕ3.1 VD7_U_РЕЛЕ4.1 VD7_U_РЕЛЕ5.1 VD7_U_РЕЛЕ6.1 VD7_U_РЕЛЕ7.1 VD7_U_РЕЛЕ8.1 XH2.1 | length 39.3
  Top Layer w0.8: DD3.3 8.244,125.244 C2.1 10.625,127.625 C3.2 10.442,131.937 XH2.1 ; v1(30,146.75) 30.1,146.65 30.1,145.479
  Bottom Layer w0.8: XH2.1 21.632,146.75 v1(30,146.75)
GND: "C1_in b1.2" "C1_in b2.2" "C1_in b3.2" "C1_in b4.2" "C1_in b5.2" "C1_in b6.2" "DD1_in b1.8" "DD1_in b1.12" "DD1_in b1.15" "DD1_in b2.8" "DD1_in b3.8" "DD1_in b4.8" "DD1_in b5.8" "DD1_in b6.8" "R5_in b1.1" "R6_in b1.1" "VD1_in b1.1" "VD1_in b2.1" "VD1_in b3.1" "VD1_in b4.1" "VD1_in b5.1" "VD1_in b6.1" "VD2_in b1.1" "VD2_in b2.1" "VD2_in b3.1" "VD2_in b4.1" "VD2_in b5.1" "VD2_in b6.1" "VD3_in b1.1" "VD3_in b2.1" "VD3_in b3.1" "VD3_in b4.1" "VD3_in b5.1" "VD3_in b6.1" "VD4_in b1.1" "VD4_in b2.1" "VD4_in b3.1" "VD4_in b4.1" "VD4_in b5.1" "VD4_in b6.1" "VD5_in b1.1" "VD5_in b2.1" "VD5_in b3.1" "VD5_in b4.1" "VD5_in b5.1" "VD5_in b6.1" "VD6_in b1.1" "VD6_in b2.1" "VD6_in b3.1" "VD6_in b4.1" "VD6_in b5.1" "VD6_in b6.1" BH1.12 C2.2 C3.1 C4.1 C5.2 C6.1 C7.1 C8.1 C9.1 C10.1 C11.2 C12.1 DD2.6 DD2.7 DD2.8 DD3.1 DD4.6 DD4.7 DD4.8 DD5.6 DD5.7 DD5.8 DD6.6 DD6.7 DD6.8 DD7.7 K1_U_РЕЛЕ1.2 K1_U_РЕЛЕ1.7 K1_U_РЕЛЕ2.2 K1_U_РЕЛЕ2.7 K1_U_РЕЛЕ3.2 K1_U_РЕЛЕ3.7 K1_U_РЕЛЕ4.2 K1_U_РЕЛЕ4.7 K1_U_РЕЛЕ5.2 K1_U_РЕЛЕ5.7 K1_U_РЕЛЕ6.2 K1_U_РЕЛЕ6.7 K1_U_РЕЛЕ7.2 K1_U_РЕЛЕ7.7 K1_U_РЕЛЕ8.2 K1_U_РЕЛЕ8.7 R7.1 R8.1 R9.1 R15.1 R16.1 R17.1 R18.1 R19.1 R20.1 R22_U_РЕЛЕ1.1 R22_U_РЕЛЕ2.1 R22_U_РЕЛЕ3.1 R22_U_РЕЛЕ4.1 R22_U_РЕЛЕ5.1 R22_U_РЕЛЕ6.1 R22_U_РЕЛЕ7.1 R22_U_РЕЛЕ8.1 VT2_U_РЕЛЕ1.2 VT2_U_РЕЛЕ2.2 VT2_U_РЕЛЕ3.2 VT2_U_РЕЛЕ4.2 VT2_U_РЕЛЕ5.2 VT2_U_РЕЛЕ6.2 VT2_U_РЕЛЕ7.2 VT2_U_РЕЛЕ8.2 XH2.2 | length 50.7
  Top Layer w0.3: DD7.7 54.75,109.5
  Top Layer w0.6: v1@28,144.526 28,145.479
  Top Layer w0.8: XH2.2 12.892,132.171 C3.1 12.475,127.525 C2.2 12.5,125 12.844,124.656 DD3.1 12.844,121.156 14.075,119.925 C4.1 16,123.704 C5.2 ; v1@28,144.526 v1(28.026,144.5) ; v1(28.026,140.954) 28.026,140.784 28.831,139.979 ; v1(32,144.5) 32,144.75 32,145.479 ; v1(36,144.5) 36,145.479
  Bottom Layer w0.8: XH2.2 18.285,140.954 v1(28.026,140.954) v1(28.026,144.5) 28.026,144.728 v1@28,144.754
NetBH1_1: BH1.1 DD7.11
NetBH1_2: BH1.2 DD7.10
NetBH1_3: BH1.3 DD7.9
NetBH1_4: BH1.4 DD7.8
NetBH1_5: BH1.5 DD7.15
NetBH1_6: BH1.6 DD7.14
NetBH1_7: BH1.7 DD7.13
NetBH1_8: BH1.8 DD7.12
NetBH1_10: BH1.10 C10.2 DD7.5 R10.1
NetBH1_11: BH1.11 DD7.4
NetBH1_13: BH1.13 DD7.32 R11.1
NetBH1_14: BH1.14 DD7.31 R12.1
NetBH2_1: BH2.1 DD7.28
NetBH2_2: BH2.2 DD7.27
NetBH2_3: BH2.3 DD7.39
NetBH2_4: BH2.4 DD7.42
NetBH2_5: BH2.5 DD7.19
NetBH2_6: BH2.6 VT1.2
NetBH3_1: BH3.1 DD7.29 R15.2
NetBH3_2: BH3.2 DD7.30 R16.2
NetBH3_3: BH3.3 DD7.26 R17.2
NetBH3_4: BH3.4 DD7.25 R18.2
NetBH3_5: BH3.5 DD7.24 R20.2
NetBH3_6: BH3.6 DD7.23 R19.2
"NetDD1_in b1_2": "DD1_in b1.2" DD6.4
"NetDD1_in b1_3": "DD1_in b1.3" "R1_in b1.2" "VD1_in b1.3"
"NetDD1_in b1_4": "DD1_in b1.4" DD5.4
"NetDD1_in b1_5": "DD1_in b1.5" "R2_in b1.2" "VD2_in b1.3"
"NetDD1_in b1_6": "DD1_in b1.6" DD4.4
"NetDD1_in b1_7": "DD1_in b1.7" "R3_in b1.2" "VD3_in b1.3"
"NetDD1_in b1_9": "DD1_in b1.9" "R4_in b1.2" "VD4_in b1.3"
"NetDD1_in b1_10": "DD1_in b1.10" DD2.4
"NetDD1_in b1_11": "DD1_in b1.11" "R5_in b1.2" "VD5_in b1.3"
"NetDD1_in b1_14": "DD1_in b1.14" "R6_in b1.2" "VD6_in b1.3"
"NetDD1_in b2_2": "DD1_in b2.2" DD2.13
"NetDD1_in b2_3": "DD1_in b2.3" "R1_in b2.2" "VD1_in b2.3" | length 1.8
  Top Layer w0.5: 29.05,148.029 29.05,149.804
"NetDD1_in b2_4": "DD1_in b2.4" DD4.13
"NetDD1_in b2_5": "DD1_in b2.5" "R2_in b2.2" "VD2_in b2.3" | length 1.8
  Top Layer w0.5: 33.05,148.029 33.05,149.804
"NetDD1_in b2_6": "DD1_in b2.6" DD5.13
"NetDD1_in b2_7": "DD1_in b2.7" "R3_in b2.2" "VD3_in b2.3" | length 1.8
  Top Layer w0.5: 37.05,148.029 37.05,149.804
"NetDD1_in b2_9": "DD1_in b2.9" "R4_in b2.2" "VD4_in b2.3" | length 1.8
  Top Layer w0.5: 41.05,148.029 41.05,149.804
"NetDD1_in b2_10": "DD1_in b2.10" DD6.13
"NetDD1_in b2_11": "DD1_in b2.11" "R5_in b2.2" "VD5_in b2.3" | length 1.8
  Top Layer w0.5: 45.05,148.029 45.05,149.804
"NetDD1_in b2_12": "DD1_in b2.12" DD2.14
"NetDD1_in b2_14": "DD1_in b2.14" "R6_in b2.2" "VD6_in b2.3" | length 1.8
  Top Layer w0.5: 49.05,148.029 49.05,149.804
"NetDD1_in b2_15": "DD1_in b2.15" DD4.14
"NetDD1_in b3_2": "DD1_in b3.2" DD5.14
"NetDD1_in b3_3": "DD1_in b3.3" "R1_in b3.2" "VD1_in b3.3"
"NetDD1_in b3_4": "DD1_in b3.4" DD6.14
"NetDD1_in b3_5": "DD1_in b3.5" "R2_in b3.2" "VD2_in b3.3"
"NetDD1_in b3_6": "DD1_in b3.6" DD2.15
"NetDD1_in b3_7": "DD1_in b3.7" "R3_in b3.2" "VD3_in b3.3"
"NetDD1_in b3_9": "DD1_in b3.9" "R4_in b3.2" "VD4_in b3.3"
"NetDD1_in b3_10": "DD1_in b3.10" DD4.15
"NetDD1_in b3_11": "DD1_in b3.11" "R5_in b3.2" "VD5_in b3.3"
"NetDD1_in b3_12": "DD1_in b3.12" DD5.15
"NetDD1_in b3_14": "DD1_in b3.14" "R6_in b3.2" "VD6_in b3.3"
"NetDD1_in b3_15": "DD1_in b3.15" DD6.15
"NetDD1_in b4_2": "DD1_in b4.2" DD2.12
"NetDD1_in b4_3": "DD1_in b4.3" "R1_in b4.2" "VD1_in b4.3"
"NetDD1_in b4_4": "DD1_in b4.4" DD4.12
"NetDD1_in b4_5": "DD1_in b4.5" "R2_in b4.2" "VD2_in b4.3"
"NetDD1_in b4_6": "DD1_in b4.6" DD5.12
"NetDD1_in b4_7": "DD1_in b4.7" "R3_in b4.2" "VD3_in b4.3"
"NetDD1_in b4_9": "DD1_in b4.9" "R4_in b4.2" "VD4_in b4.3"
"NetDD1_in b4_10": "DD1_in b4.10" DD6.12
"NetDD1_in b4_11": "DD1_in b4.11" "R5_in b4.2" "VD5_in b4.3"
"NetDD1_in b4_12": "DD1_in b4.12" DD2.1
"NetDD1_in b4_14": "DD1_in b4.14" "R6_in b4.2" "VD6_in b4.3"
"NetDD1_in b4_15": "DD1_in b4.15" DD4.1
"NetDD1_in b5_2": "DD1_in b5.2" DD5.1
"NetDD1_in b5_3": "DD1_in b5.3" "R1_in b5.2" "VD1_in b5.3"
"NetDD1_in b5_4": "DD1_in b5.4" DD6.1
"NetDD1_in b5_5": "DD1_in b5.5" "R2_in b5.2" "VD2_in b5.3"
"NetDD1_in b5_6": "DD1_in b5.6" DD2.5
"NetDD1_in b5_7": "DD1_in b5.7" "R3_in b5.2" "VD3_in b5.3"
"NetDD1_in b5_9": "DD1_in b5.9" "R4_in b5.2" "VD4_in b5.3"
"NetDD1_in b5_10": "DD1_in b5.10" DD4.5
"NetDD1_in b5_11": "DD1_in b5.11" "R5_in b5.2" "VD5_in b5.3"
"NetDD1_in b5_12": "DD1_in b5.12" DD5.5
"NetDD1_in b5_14": "DD1_in b5.14" "R6_in b5.2" "VD6_in b5.3"
"NetDD1_in b5_15": "DD1_in b5.15" DD6.5
"NetDD1_in b6_2": "DD1_in b6.2" DD7.34
"NetDD1_in b6_3": "DD1_in b6.3" "R1_in b6.2" "VD1_in b6.3"
"NetDD1_in b6_4": "DD1_in b6.4" DD6.2
"NetDD1_in b6_5": "DD1_in b6.5" "R2_in b6.2" "VD2_in b6.3"
"NetDD1_in b6_6": "DD1_in b6.6" DD5.2
"NetDD1_in b6_7": "DD1_in b6.7" "R3_in b6.2" "VD3_in b6.3"
"NetDD1_in b6_9": "DD1_in b6.9" "R4_in b6.2" "VD4_in b6.3"
"NetDD1_in b6_10": "DD1_in b6.10" DD4.2
"NetDD1_in b6_11": "DD1_in b6.11" "R5_in b6.2" "VD5_in b6.3"
"NetDD1_in b6_12": "DD1_in b6.12" DD2.2
"NetDD1_in b6_14": "DD1_in b6.14" "R6_in b6.2" "VD6_in b6.3"
"NetDD1_in b6_15": "DD1_in b6.15" DD7.33
NetDD2_3: DD2.3 DD7.48
NetDD2_9: DD2.9 DD4.9 DD5.9 DD6.9 DD7.20 R9.2
NetDD2_10: DD2.10 DD4.10 DD5.10 DD6.10 DD7.21 R8.2
NetDD2_11: DD2.11 DD4.11 DD5.11 DD6.11 DD7.22 R7.2
NetDD4_3: DD4.3 DD7.1
NetDD5_3: DD5.3 DD7.2
NetDD6_3: DD6.3 DD7.3
NetDD7_35: DD7.35 R21_U_РЕЛЕ1.1
NetDD7_36: DD7.36 R21_U_РЕЛЕ2.1
NetDD7_37: DD7.37 R21_U_РЕЛЕ3.1
NetDD7_38: DD7.38 R21_U_РЕЛЕ4.1
NetDD7_43: DD7.43 R14.1
NetDD7_44: DD7.44 R21_U_РЕЛЕ5.1
NetDD7_45: DD7.45 R21_U_РЕЛЕ6.1
NetDD7_46: DD7.46 R21_U_РЕЛЕ7.1
NetDD7_47: DD7.47 R21_U_РЕЛЕ8.1
NetK1_U_РЕЛЕ1_3: K1_U_РЕЛЕ1.3 XH15.2
NetK1_U_РЕЛЕ1_4: K1_U_РЕЛЕ1.4 XH15.4
NetK1_U_РЕЛЕ1_5: K1_U_РЕЛЕ1.5 XH15.3
NetK1_U_РЕЛЕ1_6: K1_U_РЕЛЕ1.6 XH15.1
NetK1_U_РЕЛЕ1_8: K1_U_РЕЛЕ1.8 VD7_U_РЕЛЕ1.2 VT2_U_РЕЛЕ1.3
NetK1_U_РЕЛЕ2_3: K1_U_РЕЛЕ2.3 XH14.2
NetK1_U_РЕЛЕ2_4: K1_U_РЕЛЕ2.4 XH14.4
NetK1_U_РЕЛЕ2_5: K1_U_РЕЛЕ2.5 XH14.3
NetK1_U_РЕЛЕ2_6: K1_U_РЕЛЕ2.6 XH14.1
NetK1_U_РЕЛЕ2_8: K1_U_РЕЛЕ2.8 VD7_U_РЕЛЕ2.2 VT2_U_РЕЛЕ2.3
NetK1_U_РЕЛЕ3_3: K1_U_РЕЛЕ3.3 XH13.2
NetK1_U_РЕЛЕ3_4: K1_U_РЕЛЕ3.4 XH13.4
NetK1_U_РЕЛЕ3_5: K1_U_РЕЛЕ3.5 XH13.3
NetK1_U_РЕЛЕ3_6: K1_U_РЕЛЕ3.6 XH13.1
NetK1_U_РЕЛЕ3_8: K1_U_РЕЛЕ3.8 VD7_U_РЕЛЕ3.2 VT2_U_РЕЛЕ3.3
NetK1_U_РЕЛЕ4_3: K1_U_РЕЛЕ4.3 XH12.2
NetK1_U_РЕЛЕ4_4: K1_U_РЕЛЕ4.4 XH12.4
NetK1_U_РЕЛЕ4_5: K1_U_РЕЛЕ4.5 XH12.3
NetK1_U_РЕЛЕ4_6: K1_U_РЕЛЕ4.6 XH12.1
NetK1_U_РЕЛЕ4_8: K1_U_РЕЛЕ4.8 VD7_U_РЕЛЕ4.2 VT2_U_РЕЛЕ4.3
NetK1_U_РЕЛЕ5_3: K1_U_РЕЛЕ5.3 XH11.2
NetK1_U_РЕЛЕ5_4: K1_U_РЕЛЕ5.4 XH11.4
NetK1_U_РЕЛЕ5_5: K1_U_РЕЛЕ5.5 XH11.3
NetK1_U_РЕЛЕ5_6: K1_U_РЕЛЕ5.6 XH11.1
NetK1_U_РЕЛЕ5_8: K1_U_РЕЛЕ5.8 VD7_U_РЕЛЕ5.2 VT2_U_РЕЛЕ5.3
NetK1_U_РЕЛЕ6_3: K1_U_РЕЛЕ6.3 XH10.2
NetK1_U_РЕЛЕ6_4: K1_U_РЕЛЕ6.4 XH10.4
NetK1_U_РЕЛЕ6_5: K1_U_РЕЛЕ6.5 XH10.3
NetK1_U_РЕЛЕ6_6: K1_U_РЕЛЕ6.6 XH10.1
NetK1_U_РЕЛЕ6_8: K1_U_РЕЛЕ6.8 VD7_U_РЕЛЕ6.2 VT2_U_РЕЛЕ6.3
NetK1_U_РЕЛЕ7_3: K1_U_РЕЛЕ7.3 XH9.2
NetK1_U_РЕЛЕ7_4: K1_U_РЕЛЕ7.4 XH9.4
NetK1_U_РЕЛЕ7_5: K1_U_РЕЛЕ7.5 XH9.3
NetK1_U_РЕЛЕ7_6: K1_U_РЕЛЕ7.6 XH9.1
NetK1_U_РЕЛЕ7_8: K1_U_РЕЛЕ7.8 VD7_U_РЕЛЕ7.2 VT2_U_РЕЛЕ7.3
NetK1_U_РЕЛЕ8_3: K1_U_РЕЛЕ8.3 XH8.2
NetK1_U_РЕЛЕ8_4: K1_U_РЕЛЕ8.4 XH8.4
NetK1_U_РЕЛЕ8_5: K1_U_РЕЛЕ8.5 XH8.3
NetK1_U_РЕЛЕ8_6: K1_U_РЕЛЕ8.6 XH8.1
NetK1_U_РЕЛЕ8_8: K1_U_РЕЛЕ8.8 VD7_U_РЕЛЕ8.2 VT2_U_РЕЛЕ8.3
"NetR1_in b1_1": "R1_in b1.1" XH7.1
"NetR1_in b2_1": "R1_in b2.1" XH1.1 | length 5.5
  Top Layer w0.5: 29.05,151.704 29.05,155.754 XH1.1
"NetR1_in b3_1": "R1_in b3.1" XH3.1
"NetR1_in b4_1": "R1_in b4.1" XH4.1
"NetR1_in b5_1": "R1_in b5.1" XH5.1
"NetR1_in b6_1": "R1_in b6.1" XH6.1
"NetR2_in b1_1": "R2_in b1.1" XH7.2
"NetR2_in b2_1": "R2_in b2.1" XH1.2 | length 5.3
  Top Layer w0.5: XH1.2 32.55,155.45 33.05,154.95 33.05,151.704
"NetR2_in b3_1": "R2_in b3.1" XH3.2
"NetR2_in b4_1": "R2_in b4.1" XH4.2
"NetR2_in b5_1": "R2_in b5.1" XH5.2
"NetR2_in b6_1": "R2_in b6.1" XH6.2
"NetR3_in b1_1": "R3_in b1.1" XH7.3
"NetR3_in b2_1": "R3_in b2.1" XH1.3 | length 5.9
  Top Layer w0.5: XH1.3 35.05,155.95 37.05,153.95 37.05,151.704
"NetR3_in b3_1": "R3_in b3.1" XH3.3
"NetR3_in b4_1": "R3_in b4.1" XH4.3
"NetR3_in b5_1": "R3_in b5.1" XH5.3
"NetR3_in b6_1": "R3_in b6.1" XH6.3
"NetR4_in b1_1": "R4_in b1.1" XH7.4
"NetR4_in b2_1": "R4_in b2.1" XH1.4 | length 6.5
  Top Layer w0.5: XH1.4 37.55,155.204 41.05,151.704
"NetR4_in b3_1": "R4_in b3.1" XH3.4
"NetR4_in b4_1": "R4_in b4.1" XH4.4
"NetR4_in b5_1": "R4_in b5.1" XH5.4
"NetR4_in b6_1": "R4_in b6.1" XH6.4
"NetR5_in b2_1": "R5_in b2.1" XH1.5 | length 7.1
  Top Layer w0.5: XH1.5 45.05,151.754 45.05,151.704
"NetR5_in b3_1": "R5_in b3.1" XH3.5
"NetR5_in b4_1": "R5_in b4.1" XH4.5
"NetR5_in b5_1": "R5_in b5.1" XH5.5
"NetR5_in b6_1": "R5_in b6.1" XH6.5
"NetR6_in b2_1": "R6_in b2.1" XH1.6 | length 8.6
  Top Layer w0.5: XH1.6 47.6,151.704 49.05,151.704
"NetR6_in b3_1": "R6_in b3.1" XH3.6
"NetR6_in b4_1": "R6_in b4.1" XH4.6
"NetR6_in b5_1": "R6_in b5.1" XH5.6
"NetR6_in b6_1": "R6_in b6.1" XH6.6
NetR13_1: R13.1 R14.2 VT1.1
NetR21_U_РЕЛЕ1_2: R21_U_РЕЛЕ1.2 R22_U_РЕЛЕ1.2 VT2_U_РЕЛЕ1.1
NetR21_U_РЕЛЕ2_2: R21_U_РЕЛЕ2.2 R22_U_РЕЛЕ2.2 VT2_U_РЕЛЕ2.1
NetR21_U_РЕЛЕ3_2: R21_U_РЕЛЕ3.2 R22_U_РЕЛЕ3.2 VT2_U_РЕЛЕ3.1
NetR21_U_РЕЛЕ4_2: R21_U_РЕЛЕ4.2 R22_U_РЕЛЕ4.2 VT2_U_РЕЛЕ4.1
NetR21_U_РЕЛЕ5_2: R21_U_РЕЛЕ5.2 R22_U_РЕЛЕ5.2 VT2_U_РЕЛЕ5.1
NetR21_U_РЕЛЕ6_2: R21_U_РЕЛЕ6.2 R22_U_РЕЛЕ6.2 VT2_U_РЕЛЕ6.1
NetR21_U_РЕЛЕ7_2: R21_U_РЕЛЕ7.2 R22_U_РЕЛЕ7.2 VT2_U_РЕЛЕ7.1
NetR21_U_РЕЛЕ8_2: R21_U_РЕЛЕ8.2 R22_U_РЕЛЕ8.2 VT2_U_РЕЛЕ8.1
pads on no net: "DD1_in b1.13" "DD1_in b1.16" "DD1_in b2.13" "DD1_in b2.16" "DD1_in b3.13" "DD1_in b3.16" "DD1_in b4.13" "DD1_in b4.16" "DD1_in b5.13" "DD1_in b5.16" "DD1_in b6.13" "DD1_in b6.16" BH2.7 BH2.8 BH2.9 BH2.10 BH2.11 BH2.12 BH2.13 BH2.14 BH3.7 BH3.8 BH3.9 BH3.10 BH3.11 BH3.12 BH3.13 BH3.14 DD4.16 DD7.16 DD7.17 DD7.18 DD7.40 DD7.41 XH7.5 XH7.6